# Allegro board pcb-07_dyn_copper_0.brd
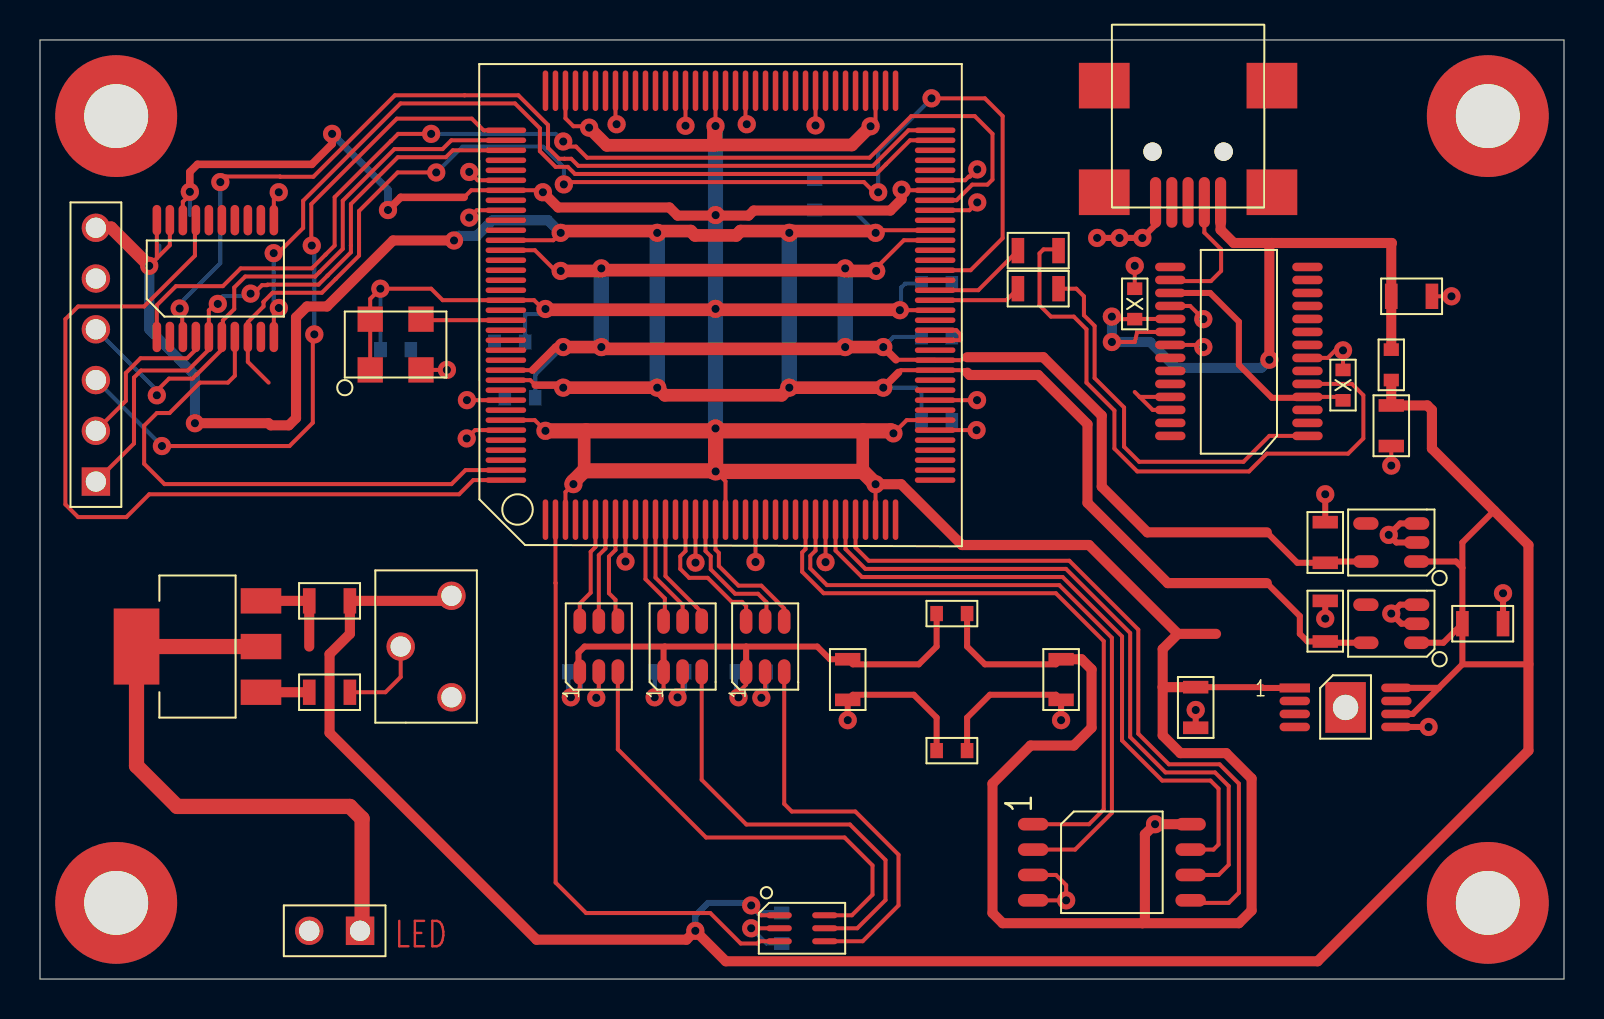
[diagram p0: board, top side]
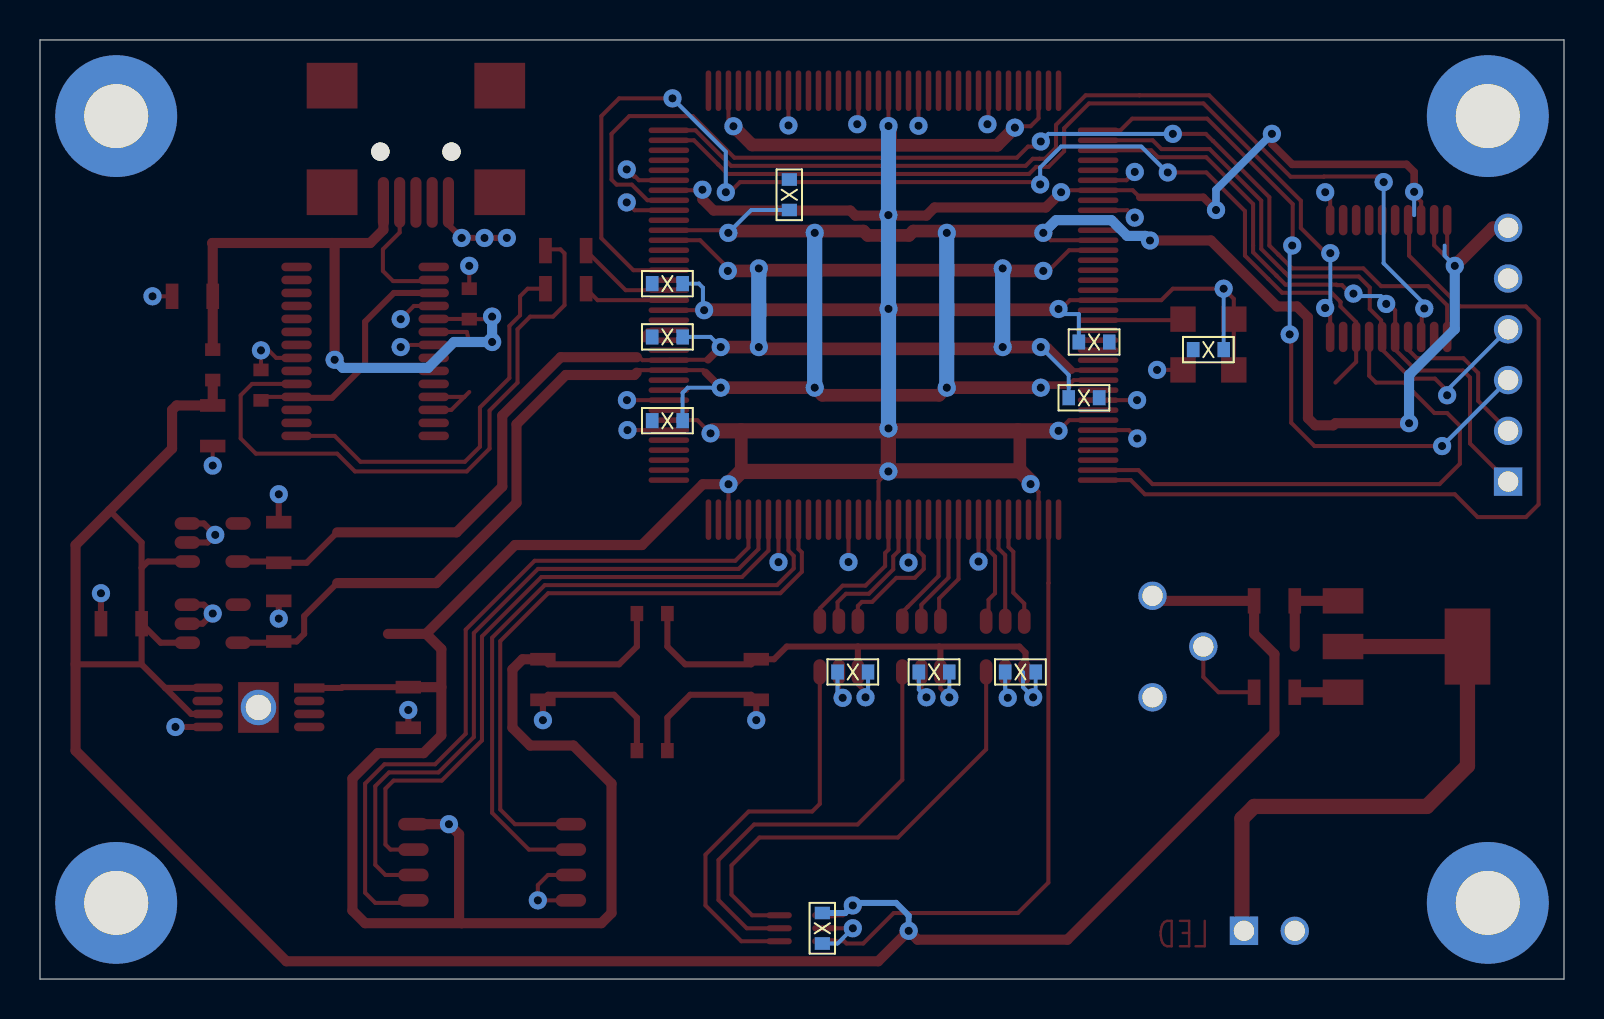
[diagram p1: board, bottom side, seen from below]

Outline 76.2 x 46.99 mm; copper layers: TOP, IN1, IN2, BOTTOM. Coordinates in mm from the lower left corner of the outline.
Outline path: 0,46.99 0,0 76.2,0 76.2,46.99 0,46.99

## Design rules (mm)
constraint set DEFAULT: min track width 0.203

## Placement (name value [footprint] x y rotation side)
C2  1uF  [S_0805]  72.14 17.78 0 top
C4  47uF/6.3V  [S_0805]  68.58 34.16 0 top
C5  47uF/6.3V  [S_0805]  64.26 17.91 90 top
C6  47uF/6.3V  [S_0805]  64.26 21.84 90 top
C7  100nF  [S_0603_X]  54.74 33.78 90 top
C11  47uF/6.3V  [S_0805]  67.56 27.69 270 top
C12  47uF/6.3V  [S_0805]  57.78 13.59 270 top
C14  100nF  [S_0603_X]  65.15 29.72 90 top
C16  100nF  [S_0603_X]  44.83 32.13 0 bottom
C18  100nF  [S_0603_X]  24 29.08 180 bottom
C24  100nF  [S_0603_X]  44.83 27.94 0 bottom
C26  100nF  [S_0603_X]  38.73 39.24 90 bottom
C32  100nF  [S_0603_X]  17.78 31.5 0 bottom
C34  100nF  [S_0603_X]  44.83 34.8 0 bottom
C36  100nF  [S_0603_X]  23.5 31.88 180 bottom
C46  100nF  [S_0603_X]  37.08 2.54 90 bottom
C47  100nF  [S_0603_X]  27.18 15.37 0 bottom
C49  100nF  [S_0603_X]  31.5 15.37 0 bottom
C51  100nF  [S_0603_X]  35.56 15.37 0 bottom
C53  47uF/6.3V  [S_0805]  51.05 14.99 270 top
C56  47uF/6.3V  [S_0805]  40.39 14.99 270 top
H*  -  [unnamed]  72.39 3.81 0 top
H*#2  -  [unnamed]  3.81 43.18 0 top
H*#3  -  [unnamed]  72.39 43.18 0 top
H*#4  -  [unnamed]  3.81 3.81 0 top
J5  CON2  [T_SIP2]  16 2.41 270 top
J8  con_1line_6  [T_SIP6]  2.79 24.89 180 top
L1  BLM18KG121TN1  [S_0603]  67.56 30.73 90 top
L2  BLM18KG121TN1  [S_0603]  45.59 18.29 0 top
L3  BLM18KG121TN1  [S_0603]  45.59 11.43 0 top
OSC1  ASFLMB-22.1184MHz  [S_ASFLMB]  17.78 31.75 90 top
Q1  BCP53  [S_SOT223]  11.05 16.64 180 top
R2  100  [S_0805]  49.91 34.54 180 top
R3  100  [S_0805]  49.91 36.45 180 top
R5  10  [S_0805]  14.48 18.92 0 top
R7  1k  [S_0805]  14.48 14.35 0 top
U1  TPS76925  [S_SOT_5_110]  67.56 17.78 180 top
U2  FTD232R  [S_SOG_28_RM256]  63.37 27.18 180 top
U3  TPS76912  [S_SOT_5_110]  67.56 21.84 180 top
U4  TPS79433_MSOP  [S_MSOP8_RM256_PPAD_HAND_MADE]  65.28 13.59 0 top
U5  TCS3103  [P_TCS310X]  38.1 2.54 0 top
U6  XC3S400-TQ144  [S_QFP_144_RM_197]  25.27 22.99 90 top
U7  AD7478ARTZ-500RL7  [S_SOT_6_110]  27.94 16.64 90 top
U8  25lc1024  [S_SOIC8_310]  49.66 7.75 0 top
U9  AD7478ARTZ-500RL7  [S_SOT_6_110]  32.13 16.64 90 top
U10  AD7478ARTZ-500RL7  [S_SOT_6_110]  36.26 16.64 90 top
U11  XCF02S  [S_SOG_20_230_RM256]  5.84 32.13 90 top
USB1  USB  [S_USB_MINI_B]  57.4 41.4 180 top
VR4  1k_SMD  [T_PT10H]  20.57 16.64 90 top

## Library data of the parts
C2 C4-C7 C11 C12 C14 C16 C18 C24 C26 C32 C34 C36 C47 C49 C51 C53 C56 = CAP NP
C46 = C
J5 = CON2
J8 = con_1line_6
L1-L3 = L
OSC1 = OSC
Q1 = PNP_SOT23_1
R2 R3 R5 R7 = R
U1 U3 = TPS769xx
U2 = FTD232R_0
U4 = TPS79401_ADJ_3
U5 = TCS3103
U6 = XC3S200_1
U7 U9 U10 = ADC081S021
U8 = AT25XXXA
U11 = XCF01S_3
USB1 = header_0
VR4 = RESISTOR VAR

## Footprints (pads in the part's own frame, mm; a bottom-side part is the same pattern mirrored in y, then rotated)
P_TCS310X
  oval 1.27x0.305 smd: 1(-1.143,0.65) 2(-1.143,0) 3(-1.143,-0.65) 4(1.143,-0.65) 5(1.143,0) 6(1.143,0.65)
S_0603
  rect 0.635x0.762 smd: 1(-0.762,0) 2(0.762,0)
S_0603_X
  rect 0.635x0.762 smd: 1(-0.762,0) 2(0.762,0)
S_0805
  rect 0.635x1.27 smd: 1(-1.016,0) 2(1.016,0)
S_ASFLMB
  rect 1.27x1.27 smd: 1(-1.27,1.27) 2(-1.27,-1.27) 3(1.27,-1.27) 4(1.27,1.27)
S_MSOP8_RM256_PPAD_HAND_MADE
  rect 1.524x0.457 smd: 1(-2.54,0.975)
  oval 1.524x0.432 smd: 2(-2.54,0.325) 3(-2.54,-0.325) 4(-2.54,-0.975) 5(2.54,-0.975) 6(2.54,-0.325) 7(2.54,0.325) 8(2.54,0.98)
  rect 2.032x2.54 hole 1.27: 9(0,0)
S_QFP_144_RM_197
  oval 2.032x0.279 smd: 1(0,0) 2(0,-0.5) 3(0,-1) 4(0,-1.5) 5(0,-2.001) 6(0,-2.501) 7(0,-3.001) 8(0,-3.501) 9(0,-4.001) 10(0,-4.501) 11(0,-5.001) 12(0,-5.501) 13(0,-6.002) 14(0,-6.502) 15(0,-7.002) 16(0,-7.502) 17(0,-8.002) 18(0,-8.502) 19(0,-9.002) 20(0,-9.502) 21(0,-10.002) 22(0,-10.503) 23(0,-11.003) 24(0,-11.503) 25(0,-12.003) 26(0,-12.503) 27(0,-13.003) 28(0,-13.503) 29(0,-14.004) 30(0,-14.504) 31(0,-15.004) 32(0,-15.504) 33(0,-16.004) 34(0,-16.504) 35(0,-17.004) 36(0,-17.504) 73(21.463,-17.504) 74(21.463,-17.004) 75(21.463,-16.504) 76(21.463,-16.004) 77(21.463,-15.504) 78(21.463,-15.004) 79(21.463,-14.504) 80(21.463,-14.004) 81(21.463,-13.503) 82(21.463,-13.003) 83(21.463,-12.503) 84(21.463,-12.003) 85(21.463,-11.503) 86(21.463,-11.003) 87(21.463,-10.503) 88(21.463,-10.002) 89(21.463,-9.502) 90(21.463,-9.002) 91(21.463,-8.502) 92(21.463,-8.002) 93(21.463,-7.502) 94(21.463,-7.002) 95(21.463,-6.502) 96(21.463,-6.002) 97(21.463,-5.501) 98(21.463,-5.001) 99(21.463,-4.501) 100(21.463,-4.001) 101(21.463,-3.501) 102(21.463,-3.001) 103(21.463,-2.501) 104(21.463,-2.001) 105(21.463,-1.5) 106(21.463,-1) 107(21.463,-0.5) 108(21.463,0)
  oval 0.279x2.032 smd: 37(1.979,-19.484) 38(2.479,-19.484) 39(2.979,-19.484) 40(3.479,-19.484) 41(3.98,-19.484) 42(4.48,-19.484) 43(4.98,-19.484) 44(5.48,-19.484) 45(5.98,-19.484) 46(6.48,-19.484) 47(6.98,-19.484) 48(7.481,-19.484) 49(7.981,-19.484) 50(8.481,-19.484) 51(8.981,-19.484) 52(9.481,-19.484) 53(9.981,-19.484) 54(10.481,-19.484) 55(10.981,-19.484) 56(11.482,-19.484) 57(11.982,-19.484) 58(12.482,-19.484) 59(12.982,-19.484) 60(13.482,-19.484) 61(13.982,-19.484) 62(14.483,-19.484) 63(14.983,-19.484) 64(15.483,-19.484) 65(15.983,-19.484) 66(16.483,-19.484) 67(16.983,-19.484) 68(17.483,-19.484) 69(17.983,-19.484) 70(18.484,-19.484) 71(18.984,-19.484) 72(19.484,-19.484) 109(19.484,1.979) 110(18.983,1.979) 111(18.484,1.979) 112(17.983,1.979) 113(17.483,1.979) 114(16.983,1.979) 115(16.483,1.979) 116(15.983,1.979) 117(15.483,1.979) 118(14.982,1.979) 119(14.482,1.979) 120(13.982,1.979) 121(13.482,1.979) 122(12.982,1.979) 123(12.482,1.979) 124(11.982,1.979) 125(11.482,1.979) 126(10.981,1.979) 127(10.481,1.979) 128(9.981,1.979) 129(9.481,1.979) 130(8.981,1.979) 131(8.481,1.979) 132(7.981,1.979) 133(7.481,1.979) 134(6.98,1.979) 135(6.48,1.979) 136(5.98,1.979) 137(5.48,1.979) 138(4.98,1.979) 139(4.48,1.979) 140(3.98,1.979) 141(3.479,1.979) 142(2.979,1.979) 143(2.479,1.979) 144(1.979,1.979)
S_SOG_20_230_RM256
  oval 1.524x0.432 smd: 1(0,0) 2(0,-0.65) 3(0,-1.3) 4(0,-1.95) 5(0,-2.6) 6(0,-3.25) 7(0,-3.9) 8(0,-4.55) 9(0,-5.2) 10(0,-5.85) 11(5.842,-5.85) 12(5.842,-5.2) 13(5.842,-4.55) 14(5.842,-3.9) 15(5.842,-3.25) 16(5.842,-2.6) 17(5.842,-1.95) 18(5.842,-1.3) 19(5.842,-0.65) 20(5.842,0)
S_SOG_28_RM256
  oval 1.524x0.432 smd: 1(0,0) 2(0,-0.65) 3(0,-1.3) 4(0,-1.951) 5(0,-2.601) 6(0,-3.251) 7(0,-3.901) 8(0,-4.552) 9(0,-5.202) 10(0,-5.852) 11(0,-6.502) 12(0,-7.153) 13(0,-7.803) 14(0,-8.453) 15(6.858,-8.453) 16(6.858,-7.803) 17(6.858,-7.153) 18(6.858,-6.502) 19(6.858,-5.852) 20(6.858,-5.202) 21(6.858,-4.552) 22(6.858,-3.901) 23(6.858,-3.251) 24(6.858,-2.601) 25(6.858,-1.951) 26(6.858,-1.3) 27(6.858,-0.65) 28(6.858,0)
S_SOIC8_310
  oval 1.524x0.635 smd: 1(0,0) 2(0,-1.27) 3(0,-2.54) 4(0,-3.81) 5(7.874,-3.81) 6(7.874,-2.54) 7(7.874,-1.27) 8(7.874,0)
S_SOT223
  rect 2.032x1.27 smd: 1(0,2.286) 2(0,0) 3(0,-2.286)
  rect 2.286x3.81 smd: 4(6.223,0)
S_SOT_5_110
  oval 1.27x0.635 smd: 1(-1.27,0.953) 2(-1.27,0) 3(-1.27,-0.953) 4(1.27,-0.953) 5(1.27,0.953)
S_SOT_6_110
  oval 1.27x0.635 smd: 1(-1.27,0.953) 2(-1.27,0) 3(-1.27,-0.953) 4(1.27,-0.953) 5(1.27,0) 6(1.27,0.953)
S_USB_MINI_B
  round 0.914 hole 0.914: (-1.778,0) (1.778,0)
  oval 0.559x2.54 smd: 1(-1.626,2.54) 2(-0.813,2.54) 3(0,2.54) 4(0.813,2.54) 5(1.626,2.54)
  rect 2.54x2.286 smd: X1(-4.191,2.032) X2(4.191,2.032) X3(-4.191,-3.302) X4(4.191,-3.302)
T_PT10H
  round 1.422 hole 1.016: 1(-2.54,0) 2(0,2.54) 3(2.54,0)
T_SIP2
  rect 1.422x1.422 hole 1.016: 1(0,0)
  round 1.422 hole 1.016: 2(0,-2.54)
T_SIP6
  rect 1.422x1.422 hole 1.016: 1(0,0)
  round 1.422 hole 1.016: 2(0,-2.54) 3(0,-5.08) 4(0,-7.62) 5(0,-10.16) 6(0,-12.7)
unnamed
  round 6.096 hole 3.2: 1(0,0)

## Nets
1V2: C6.1 C16.1 C18.1 U3.5(OUT) U6.49 U6.61 U6.121 U6.133
2V5: C5.1 C24.1 C26.1 J8.6 U1.5(OUT) U6.48 U6.62 U6.120 U6.134 U11.19(VCCO) U11.20
3V3: C12.1 C32.1 C34.1 C36.1 C53.1 L2.2 OSC1.1 OSC1.4(VCC) U4.1(VOUT) U6.3 U6.19 U6.34 U6.43 U6.54 U6.66 U6.75 U6.91 U6.106 U6.115 U6.126 U6.138(VCCO_TOP#138) U8.8 U11.18
3V3_A: C47.1 C49.1 C51.1 C56.1 L2.1 U7.1 U9.1 U10.1
5V: C2.1 C11.1 C46.2 L1.1 R5.2 U1.1 U3.1 U4.6 U4.8 U5.1 VR4.3
GND: C2.2 C4.2 C5.2 C6.2 C7.2 C11.2 C12.2 C14.2 C16.2 C18.2 C24.2 C26.2 C32.2 C34.2 C36.2 C53.2 J5.2 J8.5 L3.2 OSC1.2 U1.2 U1.3 U2.7 U2.18 U2.21 U2.25 U2.26 U3.2 U3.3 U4.5 U4.9 U6.9 U6.16 U6.22 U6.29 U6.42 U6.45 U6.64 U6.67 U6.81 U6.88 U6.94 U6.101 U6.114 U6.117 U6.136 U6.139 U6.142 U8.3(W\P\) U8.4 U11.11 USB1.5 VR4.1
GNDA: C46.1 C47.2 C49.2 C51.2 C56.2 L3.1 U5.2 U7.2 U9.2 U10.2
B_CS: U6.15 U10.6
B_SCLK: U6.18 U10.4
B_SDATA: U6.17 U10.5
CLK: OSC1.3 U6.128
EE_CS: U6.27 U8.1
EE_HOLD: U6.30 U8.7
EE_SCK: U6.31 U8.6
EE_SI: U6.32 U8.5
EE_SO: U6.28 U8.2
G_CS: U6.11 U9.6
G_SCLK: U6.13 U9.4
G_SDATA: U6.12 U9.5
JTAG_TCK: J8.4 U6.110 U11.6
JTAG_TDI: J8.2 U11.4
JTAG_TDO: J8.3 U6.109
JTAG_TMS: J8.1 U6.111 U11.5
MFP: U5.3 U6.2
R_CS: U6.6 U7.6
R_SCLK: U6.8 U7.4
R_SDATA: U6.7 U7.5
USB_5V: C4.1 C7.1 L1.2 U2.19 U2.20 USB1.1
USB_RXD: R3.2 U6.56
USB_TXD: R2.2 U6.55
VOB: U5.4 U10.3(VIN)
VOG: U5.5 U9.3(VIN)
VOR: U5.6(VOR) U7.3(VIN)
X1: USB1.X1
X2: USB1.X2
X3: USB1.X3
X4: USB1.X4
N14222977: U6.58 U11.8
N14223549: U6.143 U11.7
N14223915: U6.144 U11.17
N14224669: U6.72 U11.3
N14224673: U6.71 U11.10
N14224773: U6.65 U11.1
N16483571: R2.1 U2.1
N16483583: C14.1 U2.4(VCCIO) U2.17
N16483649: R3.1 U2.5
N16483653: U2.16 USB1.2
N16483901: U2.15 USB1.3
N16494125: Q1.3(E) R5.1
N16494241: Q1.1 R7.1
N16494548: J5.1 Q1.2 Q1.4
N16494949: R7.2 VR4.2(WIPER)

Pads without a net: H* 1; H*#2 1; H*#3 1; H*#4 1; U1 4; U2 2 3 6 8 9 10 11 12 13 14 22 23 24 27 28; U3 4; U4 2 3 4 7; U6 1 4 5 10 14 20 21 23 24 25 26 33 35 36 37 38 39 40 41 44 46 47 50 51 52 53 57 59 60 63 68 69 70 73 74 76 77 78 79 80 82 83 84 85 86 87 89 90 92 93 95 96 97 98 99 100 102 103 104 105 107 108 112 113 116 118 119 122 123 124 125 127 129 130 131 132 135 137 140 141; U11 2 9 12 13 14 15 16; USB1 4

## Via types
v1: diameter 0.914, hole 0.406, TOP to BOTTOM, 104 vias

## Routing (per net, layer and track width the routed paths; a pad name or vN(x,y) marks a point on that pad's centre or on a via; arc(x,y) is an arc through that point)
1V2: length 86.2
  TOP w0.203: v1(26.04,35.43) 25.78,35.43 24.74,36.47 U6.121 ; 46.36,31.11 46.23,31.11 46.08,30.97 U6.49 44.74,30.99 42.8,30.99 ; v1(41.81,35.43) 41.91,35.53 41.91,35.69 43.19,36.97 U6.61 ; 24.63,30.47 U6.133
  TOP w0.305: 61.34,22.35 62.87,20.83 C6.1 64.33,20.89 U3.5
  TOP w0.381: v1(42.16,31.62) 42.8,30.99 ; v1(26.16,31.62) 25.78,31.62 24.63,30.47
  TOP w0.508: 61.34,22.35 55.37,22.35 53.09,24.64 53.09,28.19 50.16,31.11 46.36,31.11
  TOP w0.635: v1(41.81,35.43) 40.39,35.43 v1(40.26,35.56) 40.17,35.47 28.16,35.47 v1(28.07,35.56) 27.94,35.43 v1(26.04,35.43) ; v1(42.16,31.62) v1(40.26,31.62) 40.17,31.53 28.16,31.53 v1(28.07,31.62) v1(26.16,31.62)
  BOTTOM w0.203: 24.77,29.08 24.77,30.23 v1(26.16,31.62) ; C16.1 42.67,32.13 v1(42.16,31.62)
  BOTTOM w0.762: v1(40.26,35.56) v1(40.26,31.62) ; v1(28.07,35.56) v1(28.07,31.62)
2V5: length 140.7
  TOP w0.203: 5.84,36.07 v1(5.46,35.69) ; 5.84,36.07 6.49,36.72 U11.19 ; 5.84,36.07 U11.20 ; 46.37,30.34 46.24,30.47 U6.48 43.04,30.47 42.93,30.35 ; U6.134 24.52,29.97 24.77,29.72 ; v1(26.16,29.59) 26.04,29.72 ; v1(26.04,37.34) 25.67,36.97 U6.120 ; U6.62 42.17,37.47 42.04,37.34 v1(41.78,37.34)
  TOP w0.305: U1.5 64.33,16.83 C5.1 63.37,16.89 62.99,17.27 62.99,18.16 61.34,19.81
  TOP w0.381: 26.04,29.72 24.77,29.72 ; 42.93,30.35 v1(42.16,29.59)
  TOP w0.508: 46.37,30.34 46.48,30.23 49.91,30.23 52.37,27.76 52.37,23.83 56.39,19.81 61.34,19.81 ; v1(20.7,36.96) 17.65,36.96 14.35,33.66 13.35,33.66 12.8,33.11 12.8,28.07 12.44,27.71 11.54,27.71 11.43,27.81 v1(7.75,27.81)
  TOP w0.635: v1(26.04,37.34) 26.12,37.43 30.77,37.43 v1(30.86,37.34) 30.95,37.43 32.54,37.43 32.75,37.21 34.81,37.21 35.03,37.43 37.38,37.43 v1(37.47,37.34) 37.59,37.34 37.68,37.43 41.69,37.43 v1(41.78,37.34) ; J8.6 3.56,37.59 v1(5.46,35.69) ; v1(42.16,29.59) v1(37.47,29.59) 37.08,29.21 31.24,29.21 v1(30.86,29.59) v1(26.16,29.59)
  BOTTOM w0.203: v1(5.46,35.69) 5.97,36.2 5.97,36.7 ; v1(42.16,29.59) 43.81,29.59 44.07,29.34 C24.1 ; C26.1 40.64,38.48 v1(41.78,37.34)
  BOTTOM w0.508: v1(5.46,35.69) 5.46,32.51 7.75,30.23 v1(7.75,27.81) ; v1(20.7,36.96) 20.93,37.19 21.84,37.19 22.63,37.97 25.4,37.97 v1(26.04,37.34)
  BOTTOM w0.762: v1(37.47,37.34) v1(37.47,29.59) ; v1(30.86,37.34) v1(30.86,29.59)
3V3: length 262.8
  TOP w0.203: U6.138 24.74,27.97 v1(25.27,27.43) ; v1(43.08,39.5) 43.43,39.5 43.46,39.47 U6.66 ; 41.78,22.99 v1(41.78,24.76) ; U11.18 7.14,38.89 7.49,39.24 v1(7.49,39.39) ; U6.91 v1(33.78,42.69) ; U6.43 43.33,27.97 v1(42.67,27.3) ; U6.106 26.27,43.07 26.67,42.67 27.39,42.67 v1(27.46,42.6) ; U6.3 26.27,24.37 v1(26.67,24.76) ; 34.28,22.99 34.28,24.91 v1(33.78,25.4) ; v1(25.27,33.53) 25.15,33.53 24.71,33.97 U6.126 20.13,33.97 19.56,34.54 v1(17.02,34.54) 16.51,34.04 OSC1.4 OSC1.1 ; U6.75 41.78,42.92 v1(41.53,42.67) ; v1(25.15,39.37) 25.05,39.47 U6.115 21.56,39.47 21.21,39.12 ; U6.54 v1(42.99,33.47)
  TOP w0.305: C53.1 50.8,15.75 47.24,15.75 46.36,16.64 L2.2 ; C12.1 61.09,14.6 61.13,14.56 U4.1
  TOP w0.381: v1(17.4,38.48) 18.03,39.12 21.21,39.12 ; v1(14.61,42.29) 14.61,41.78 13.59,40.77 7.87,40.77 7.49,40.39 v1(7.49,39.39) ; 34.01,38.25 33.81,38.25 v1(33.78,38.23) 33.76,38.2 33.5,38.2
  TOP w0.508: 33.5,38.2 31.88,38.2 31.47,38.61 25.91,38.61 v1(25.15,39.37) ; 33.78,33.47 v1(33.78,33.53) ; 34.01,38.25 34.06,38.2 35.43,38.2 35.69,38.46 42.52,38.46 43.08,39.02 v1(43.08,39.5) ; 56.13,14.6 56.13,16.51 56.9,17.27 ; 56.13,14.6 56.13,12.19 57.02,11.3 59.31,11.3 60.58,10.03 60.58,3.43 59.94,2.79 55.12,2.79 ; 56.13,14.6 C12.1 ; 55.12,2.79 48.13,2.79 47.62,3.3 47.62,9.78 49.53,11.68 51.69,11.68 52.58,12.57 52.58,15.49 52.07,16 C53.1 ; 55.12,2.79 55.25,2.92 55.25,7.24 v1(55.75,7.75) U8.8 ; 56.9,17.27 52.45,21.72 46.1,21.72 43.06,24.76 v1(41.78,24.76) ; 56.9,17.27 58.8,17.27 ; v1(33.78,27.55) 33.79,27.55 33.91,27.43
  TOP w0.635: 27.21,25.43 27.21,27.34 27.3,27.43 ; 41.15,27.43 41.14,27.42 41.14,25.4 ; v1(41.53,42.67) 40.59,41.74 33.8,41.74 33.74,41.8 33.66,41.72 28.34,41.72 v1(27.46,42.6) ; v1(42.99,33.47) 42.97,33.49 33.8,33.49 33.78,33.47 33.76,33.49 25.31,33.49
  TOP w0.762: v1(41.78,24.76) 41.14,25.4 v1(33.78,25.4) ; v1(33.78,25.4) 33.78,27.55 v1(33.78,27.55) ; v1(33.78,25.4) 33.63,25.4 33.59,25.43 27.21,25.43 26.67,24.89 v1(26.67,24.76) ; v1(42.67,27.3) 42.55,27.43 v1(25.27,27.43) ; v1(33.78,42.69) 33.74,42.65 33.74,41.8 ; v1(25.27,33.53) 25.31,33.49
  BOTTOM w0.203: C34.1 43.26,34.8 43.05,34.59 43.05,33.53 v1(42.99,33.47) ; C32.1 v1(17.02,34.54) ; v1(25.27,33.53) 25.02,33.27 24.26,33.27 C36.1 ; v1(7.49,39.39) 7.49,38.23
  BOTTOM w0.381: v1(14.61,42.29) 17.4,39.5 v1(17.4,38.48) ; 33.78,38.23 v1(33.78,38.23)
  BOTTOM w0.508: 33.78,38.47 33.78,38.48
  BOTTOM w0.762: v1(33.78,42.69) v1(33.78,33.53) v1(33.78,27.55)
3V3_A: length 33.7
  TOP w0.203: v1(30.73,14.1) 31.18,14.54 U9.1 ; U10.1 35.31,14.73 34.93,14.35 v1(34.93,14.1) ; v1(26.54,14.1) 26.99,14.54 U7.1
  TOP w0.305: U9.1 31.18,16.57 31.24,16.64 ; 31.24,16.64 35.31,16.64 ; 31.24,16.64 27.23,16.64 26.92,16.33 26.92,15.43 U7.1 ; 35.31,16.64 U10.1 ; 35.31,16.64 38.86,16.64 39.5,16 C56.1 40.64,15.75 43.94,15.75 44.83,16.64 L2.1
  BOTTOM w0.203: C49.1 v1(30.73,14.1) ; 27.05,15.37 27.05,14.6 v1(26.54,14.1) 26.42,14.22 C47.1 ; C51.1 34.8,14.22 v1(34.93,14.1)
5V: length 134.4
  TOP w0.203: v1(35.56,3.68) 36.05,3.19 U5.1
  TOP w0.305: 71.12,20.57 70.8,20.89 U3.1 ; 71.12,20.57 71.12,21.84 72.71,23.43 ; 71.12,20.57 C2.1 ; U4.8 69.94,14.57 ; 69.94,14.57 71.12,15.75 ; 69.94,14.57 68.64,13.26 U4.6 ; 71.12,15.75 74.42,15.75 ; 71.12,15.75 C2.1 ; C2.1 70.17,16.83 U1.1
  TOP w0.508: L1.1 C11.1 69.37,28.7 69.6,28.47 69.6,26.54 74.42,21.72 74.42,11.43 63.88,0.89 34.29,0.89 v1(32.77,2.41) 32.32,1.97 24.83,1.97 14.48,12.32 14.48,16.26 15.49,17.27 R5.2 20.32,18.92 VR4.3
  BOTTOM w0.305: v1(32.77,2.41) 32.77,3.17 33.4,3.81 35.43,3.81 v1(35.56,3.68) 35.94,3.3 C46.2
GND: length 77.3
  TOP w0.203: v1(35.34,42.77) 35.28,42.84 U6.88 ; v1(21.46,38.1) 21.83,38.47 U6.117 ; OSC1.2 v1(20.35,30.48) ; 29.27,22.99 v1(29.27,20.89) ; U6.64 46.47,38.47 v1(46.86,38.86) ; U2.7 64.39,31.08 64.77,31.46 v1(65.15,31.46) C14.2 ; 54.98,29.13 55.63,28.48 U2.26 ; 54.98,29.13 U2.25 ; 54.98,29.13 54.74,29.38 ; U6.42 v1(46.83,27.47) ; C4.2 v1(70.57,34.16) ; v1(11.94,39.37) 11.69,39.12 U11.11 ; U6.67 46.25,39.97 46.44,40.16 46.51,40.16 v1(46.86,40.51) ; 39.28,22.99 v1(39.28,20.86) ; U8.3 50.8,5.21 51.31,4.7 v1(51.31,3.94) 49.66,3.94 ; U6.136 v1(21.35,28.97) ; U6.101 28.77,42.85 28.83,42.8 v1(28.83,42.77) ; U2.21 58.06,31.73 v1(58.17,31.62) ; v1(21.46,40.39) 21.88,39.97 U6.114 ; U6.94 v1(32.27,42.7) ; U6.81 v1(38.78,42.71) ; U6.139 21.75,27.47 v1(21.34,27.05) ; v1(58.17,33.02) 57.51,33.68 U2.18 ; C11.2 v1(67.56,25.69) ; U6.45 v1(46.85,28.97) ; 32.77,22.99 v1(32.77,20.84) ; C7.2 v1(54.74,35.69) ; 35.78,22.99 v1(35.78,20.87)
  TOP w0.305: U3.3 68.01,22.8 v1(67.44,22.22) 67.82,21.84 U3.2 ; U1.3 68.01,18.73 v1(67.56,18.29) 68.07,17.78 U1.2 ; v1(51.05,12.95) C53.2 50.8,14.22 47.5,14.22 46.36,13.08 L3.2 ; C12.2 v1(57.78,13.46) ; C2.2 v1(73.15,19.3) ; USB1.5 55.78,37.74 v1(55.12,37.08) v1(53.98,37.08) v1(52.86,37.08) ; C5.2 v1(64.26,18.03) ; C6.2 v1(64.26,24.26) ; U4.5 v1(69.43,12.61)
GNDA: length 19.2
  TOP w0.203: v1(31.88,14.1) 32.13,14.35 U9.2 ; v1(36.07,14.07) 36.07,14.1 36.26,14.29 U10.2 ; U7.2 27.94,14.22 27.81,14.1 v1(27.81,14.07) ; U5.2 v1(35.56,2.54)
  TOP w0.305: L3.1 44.83,13.08 43.69,14.22 40.64,14.22 C56.2 v1(40.39,12.95)
  BOTTOM w0.203: v1(27.81,14.07) 27.94,14.2 U7.2 ; C49.2 32.26,14.48 v1(31.88,14.1) ; v1(36.07,14.07) 36.32,14.33 C51.2 ; v1(35.56,2.54) 36.32,1.78 C46.1
B_CS: length 7.4
  TOP w0.203: U10.6 35.31,18.67 35.1,18.87 34.59,18.87 33.39,20.07 32.46,20.07 32.01,20.52 32.01,21.15 32.27,21.41 32.27,22.99
B_SCLK: length 7.2
  TOP w0.203: U10.4 37.21,18.54 36.07,19.68 34.93,19.68 33.94,20.67 33.94,21.32 33.78,21.49 33.78,22.99
B_SDATA: length 7
  TOP w0.203: U10.5 36.32,17.97 36.32,18.86 35.9,19.28 34.76,19.28 33.54,20.5 33.54,21.15 33.27,21.41 33.27,22.99
CLK: length 4.3
  TOP w0.203: OSC1.3 19.1,32.97 U6.128
EE_CS: length 31.5
  TOP w0.203: U8.1 52.45,7.75 53.19,8.48 53.19,16.91 50.79,19.3 39.18,19.3 38.11,20.38 38.11,21.35 38.28,21.51 38.28,22.99
EE_HOLD: length 33
  TOP w0.203: U8.7 58.67,6.48 58.93,6.73 58.93,9.52 58.52,9.93 56.11,9.93 54.1,11.94 54.1,17.14 51.13,20.12 41.1,20.12 39.78,21.44 39.78,22.99
EE_SCK: length 34.6
  TOP w0.203: 40.28,22.99 40.28,21.51 41.27,20.52 51.3,20.52 54.51,17.31 54.51,12.11 56.28,10.34 58.75,10.34 59.44,9.65 59.44,5.71 58.93,5.21 U8.6
EE_SI: length 36.6
  TOP w0.203: 40.78,22.99 40.78,21.59 41.44,20.93 51.47,20.93 54.91,17.48 54.91,12.27 56.45,10.74 58.98,10.74 59.94,9.78 59.94,4.32 59.44,3.81 57.66,3.81 57.53,3.94
EE_SO: length 32.5
  TOP w0.203: 38.78,22.99 38.78,21.44 38.51,21.18 38.51,20.55 39.35,19.71 50.96,19.71 53.59,17.08 53.59,8.32 51.76,6.48 U8.2
G_CS: length 5.5
  TOP w0.203: 30.27,22.99 30.27,20.01 31.24,19.04 31.24,17.97 U9.6
G_SCLK: length 5.8
  TOP w0.203: 31.27,22.99 31.27,20.16 32.82,18.62 33.02,18.42 33.02,17.97 U9.4
G_SDATA: length 5.6
  TOP w0.203: 30.77,22.99 30.77,20.09 32.13,18.73 U9.5
JTAG_TCK: length 30.3
  TOP w0.203: U6.110 20.57,41.97 20.13,41.53 17.72,41.53 15.14,38.95 15.14,36.53 13.97,35.37 13.76,35.15 10.26,35.15 9.71,34.6 9.71,33.53 9.14,32.96 9.14,32.18 U11.6 9.09,31.5 7.85,30.25 7.83,30.25 7.63,30.04 6.45,30.04 5.84,29.43 v1(5.84,29.21)
  BOTTOM w0.203: v1(5.84,29.21) 5.84,29.46 J8.4
JTAG_TDI: length 8.1
  TOP w0.203: J8.2 4.29,28.93 4.29,30.33 5.03,31.06 7.36,31.06 7.79,31.5 U11.4
JTAG_TDO: length 35.5
  TOP w0.203: v1(13.72,32.26) 13.64,32.18 13.64,27.84 12.47,26.67 v1(6.1,26.67) ; U6.109 22.17,42.47 21.59,43.05 17.84,43.05 13.56,38.78 13.56,36.73 v1(13.59,36.7)
  BOTTOM w0.203: v1(13.72,32.26) 13.72,36.58 v1(13.59,36.7) ; v1(6.1,26.67) J8.3
JTAG_TMS: length 31.9
  TOP w0.203: U6.111 20.64,41.47 20.29,41.12 17.89,41.12 15.54,38.78 15.54,36.7 15.55,36.7 15.55,36.37 14.38,35.2 13.93,34.75 11.38,34.75 11.35,34.72 11.1,34.72 10.68,34.3 v1(10.53,34.3) ; v1(8.89,33.78) 8.76,33.78 8.44,33.46 U11.5 8.44,31.5 7.39,30.45 5.05,30.45 4.7,30.1 4.7,26.8 J8.1
  BOTTOM w0.203: v1(10.53,34.3) 10.4,34.17 9.15,34.17 8.95,33.97 8.95,33.84 v1(8.89,33.78)
MFP: length 30.6
  TOP w0.203: U5.3 35.99,1.89 35.88,1.78 35.04,1.78 33.51,3.3 27.3,3.3 25.78,4.83 25.78,19.81 25.77,19.82 U6.2
Net_1: length 2.9
  TOP w0.203: 44.76,31.97 46.01,31.97 46.02,31.98 46.02,32.26 45.81,32.47 44.76,32.47
R_CS: length 5.4
  TOP w0.203: U7.6 26.99,18.79 27.53,19.33 27.53,21.38 27.77,21.62 U6.6
R_SCLK: length 5.4
  TOP w0.203: U6.8 28.77,21.47 28.45,21.14 28.45,19.3 28.77,18.98 28.77,18.03 U7.4
R_SDATA: length 5.2
  TOP w0.203: U6.7 28.27,21.54 27.94,21.21 U7.5
USB_5V: length 38.3
  TOP w0.203: v1(53.59,33.15) 53.72,33.02 C7.1 54.37,33.03 U2.19 ; v1(53.59,31.88) 54.74,31.88 54.86,32.38 U2.20
  TOP w0.508: 61.59,36.83 61.47,36.7 v1(61.47,30.99) ; 61.59,36.83 59.69,36.83 59.03,37.49 USB1.1 ; 61.59,36.83 67.59,36.83 67.56,36.8 C4.1 L1.2
  BOTTOM w0.508: v1(53.59,33.15) v1(53.59,31.88) 55.5,31.88 56.79,30.58 61.06,30.58 v1(61.47,30.99)
USB_RXD: length 5
  TOP w0.203: U6.56 46.91,34.47 R3.2
USB_TXD: length 4.4
  TOP w0.203: U6.55 48.32,33.97 R2.2
VOB: length 20.3
  TOP w0.203: U5.4 41.13,1.89 42.93,3.68 42.93,6.22 40.77,8.38 37.59,8.38 37.21,8.76 U10.3
VOG: length 21.9
  TOP w0.203: U5.5 40.86,2.54 42.28,3.95 42.28,5.95 40.5,7.73 35.32,7.73 33.08,9.97 U9.3
VOR: length 23.3
  TOP w0.203: U7.3 28.89,11.49 33.3,7.08 40.23,7.08 41.63,5.68 41.63,4.22 40.59,3.19 U5.6
N14222977: length 61.5
  TOP w0.203: v1(41.91,39.37) 41.71,39.37 41.2,39.88 26.26,39.88 26.19,39.81 v1(26.19,39.76) ; v1(44.58,44.07) 47.24,44.07 48.13,43.18 48.13,37.07 46.53,35.47 U6.58 ; v1(19.81,40.36) 17.88,40.36 15.95,38.43 15.95,36.87 15.95,36.2 14.78,35.03 14.78,35.03 14.09,34.34 11.63,34.34 11.18,33.89 11.18,33.87 11.18,33.87 11.18,33.66 10.39,32.87 U11.8 10.39,30.88 11.43,29.84
  BOTTOM w0.203: v1(41.91,39.37) 41.91,41.4 v1(44.58,44.07) ; v1(26.19,39.76) 26.19,40.61 25.15,41.66 21.13,41.66 19.84,40.36 v1(19.81,40.36)
N14223549: length 28.2
  TOP w0.203: U11.7 9.74,30.19 9.4,29.84 8,29.84 6.48,28.32 5.84,28.32 5.21,27.69 5.21,25.78 6.22,24.76 20.57,24.76 21.28,25.47 U6.143
N14223915: length 41.9
  TOP w0.203: U6.144 21.66,24.97 20.96,24.26 5.46,24.26 4.32,23.11 1.91,23.11 1.27,23.75 1.27,33.02 1.91,33.66 5.21,33.66 7.75,36.2 7.75,37.93 U11.17
N14224669: length 49.1
  TOP w0.203: v1(9.02,39.88) 9.3,40.16 12,40.16 12.01,40.14 13.67,40.14 17.74,44.22 21.23,44.22 23.92,44.22 25.4,42.74 25.4,41.59 25.95,41.05 26.22,41.05 26.56,41.05 26.92,40.69 41.65,40.69 41.88,40.93 43.43,42.47 U6.72 ; v1(6.99,33.55) 6.99,33.53 7.11,33.4 7.11,32.16 U11.3
  BOTTOM w0.203: v1(6.99,33.55) 6.99,33.78 9.02,35.81 v1(9.02,39.88)
N14224673: length 44.2
  TOP w0.203: v1(11.94,33.58) 11.89,33.58 11.69,33.38 U11.10 ; v1(11.68,36.32) 11.9,36.32 13.16,37.58 13.16,38.94 18.03,43.81 23.75,43.81 24.99,42.57 24.99,41.43 25.78,40.64 26.39,40.64 26.75,40.28 41.82,40.28 42.29,40.76 43.5,41.97 U6.71
  BOTTOM w0.203: v1(11.68,36.32) 11.68,33.91 11.94,33.66 11.94,33.58 v1(11.94,33.58)
N14224773: length 55.6
  TOP w0.203: U6.65 45.83,38.97 46.61,39.75 47.37,39.75 47.62,40 47.62,42.29 46.74,43.18 43.56,43.18 41.48,41.1 27.36,41.1 26.8,41.66 26.42,41.66 v1(26.16,41.91) ; U11.1 5.84,33.72 6.8,34.67 9.14,34.67 10.03,35.56 13.59,35.56 14.28,36.25 14.73,36.7 14.73,39.12 17.54,41.94 17.55,41.94 17.91,42.29 v1(19.56,42.29)
  BOTTOM w0.203: v1(19.56,42.29) 25.78,42.29 v1(26.16,41.91)
N16483571: length 19.8
  TOP w0.203: R2.1 51.82,34.54 52.2,34.16 52.2,33.21 52.73,32.68 52.73,30.07 54.2,28.6 54.2,26.64 54.96,25.88 60.17,25.88 61.47,27.18 U2.1
N16483583: length 12.2
  TOP w0.203: U2.4 64.98,29.13 C14.1
  TOP w0.305: U2.4 63.33,29.08 61.59,29.08 59.94,30.73 59.94,32.89 58.51,34.33 U2.17
N16483649: length 31.8
  TOP w0.203: U2.5 65.6,29.78 66.17,29.21 66.17,27.05 65.41,26.29 61.34,26.29 60.45,25.4 54.86,25.4 53.72,26.54 53.72,28.45 52.32,29.84 52.32,32.51 51.69,33.15 50.55,33.15 49.97,33.72 49.97,36.31 50.18,36.51 50.86,36.51 R3.1
N16483653: length 6.5
  TOP w0.203: U2.16 56.57,34.92 58.55,34.92 59.05,35.43 59.05,36.52 58.22,37.35 USB1.2
N16494125: length 4.7
  TOP w0.508: Q1.3 R5.1 13.46,16.64
N16494241: length 2.4
  TOP w0.508: R7.1 Q1.1
N16494548: length 30.2
  TOP w0.762: Q1.2 Q1.4 4.83,10.67 6.86,8.64 15.49,8.64 16.1,8.03 16.1,2.51 J5.1
N16494949: length 4.4
  TOP w0.203: R7.2 17.27,14.35 18.03,15.11 VR4.2

## Text on the board
TOP: LED | RGB_eval
